# Altium PCB 【tb7152677】dengyuxiang v3.0.PcbDoc (part 2 of 2)
Units mm, origin at the board's own origin, x right, y up, seen from the top; angles counter-clockwise.
Board outline 152.4 x 101.6 mm, 2 copper layers (Top Layer, Bottom Layer); 58 components, 46 nets, 215 pads, 61 vias.
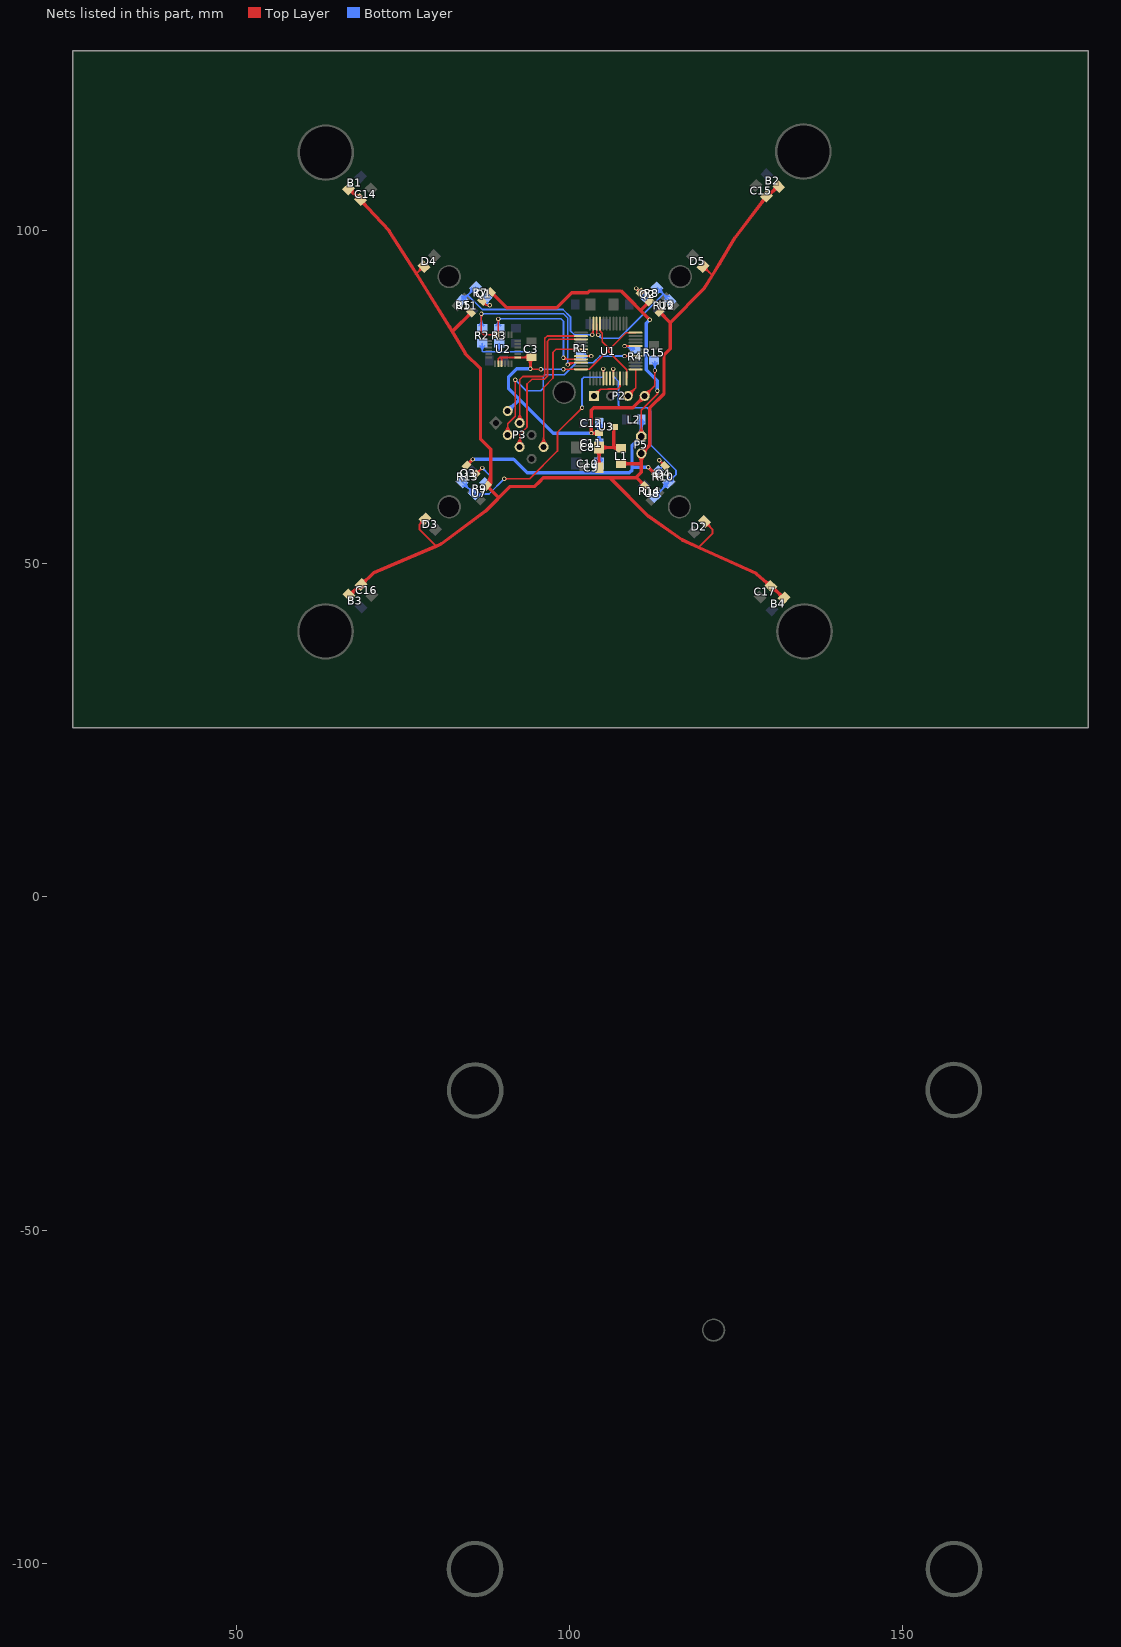
[diagram p2: the nets of this part, all layers, seen from the top]

## Via types
v1: diameter 0.635, hole 0.381, Top Layer to Bottom Layer, 61 vias

## Nets (pads, with @x,y where several pads share a name; then routed paths per layer and width w, separated by ;. In a path a pad name is that pad's centre, name@x,y a point inside that pad or via, vN(x,y) a via of type N, cw(c..) or ccw(c..) an arc to the next point about the centre after c; other vN are vias at no path point) (continued)
NetQ1_1: Q1.1 R7.2 | length 4.7
  Top Layer w0.254: Q1.1@86.864,89.404 87.496,88.773 ; Q1.1@87.016,88.95 cw(c87.065,88.342) 87.496,88.773 ; Q1.1@87.319,89.252 ccw(c87.927,89.204) 87.496,88.773 ; v1@87.876,88.638 ccw(c87.551,88.313) 87.551,88.773 ccw(c87.551,89.233) v1@87.876,88.908 ; v1(88.011,88.773) 87.496,88.773
  Bottom Layer w0.254: R7.2@87.47,89.314 v1(88.011,88.773) ; v1@87.82,88.773 ccw(c87.361,88.773) 87.686,89.098 ccw(c88.011,89.423) v1@88.011,88.963
NetQ2_1: Q2.1 R8.2 | length 7.7
  Top Layer w0.254: v1@109.982,91.123 cw(c109.982,90.663) 110.307,90.988 cw(c110.632,91.313) v1@110.172,91.313 ; v1(109.982,91.313) Q2.1@110.613,90.682 ; Q2.1@110.283,90.682 ccw(c109.486,90.682) 110.05,91.245 ccw(c110.613,91.809) Q2.1@110.613,91.012
  Bottom Layer w0.254: v1@109.982,91.123 cw(c109.982,90.663) 110.307,90.988 cw(c110.632,91.313) v1@110.172,91.313 ; v1(109.982,91.313) R8.2@111.507,89.788 ; 110.546,90.749 cw(c109.667,89.871) R8.2@110.91,89.871 ; 110.562,90.733 ccw(c111.418,91.588) R8.2@111.418,90.379
NetQ3_1: Q3.1 R9.2 | length 7.2
  Top Layer w0.254: Q3.1@85.856,63.369 v1(86.868,64.382) ; Q3.1@85.981,63.825 ccw(c85.981,64.623) 86.545,64.059 ccw(c87.109,63.495) Q3.1@86.311,63.495 ; v1@86.677,64.382 cw(c86.218,64.382) 86.543,64.057 cw(c86.868,63.731) v1@86.868,64.191
  Bottom Layer w0.254: v1@86.868,64.191 cw(c86.868,63.731) 87.193,64.057 cw(c87.518,64.382) v1@87.058,64.382 ; v1(86.868,64.382) 88.011,63.239 88.011,62.748 R9.2@87.333,62.07
NetQ4_1: Q4.1 R10.2 | length 6.3
  Top Layer w0.254: v1@113.418,65.341 cw(c113.418,64.882) 113.743,65.207 cw(c114.069,65.532) v1@113.609,65.532 ; v1(113.418,65.532) Q4.1@114.304,64.647 ; Q4.1@113.848,64.772 ccw(c113.05,64.772) 113.614,65.336 ccw(c114.178,65.9) Q4.1@114.178,65.102
  Bottom Layer w0.254: R10.2@113.19,63.838 114.046,64.694 114.046,64.904 v1(113.418,65.532) ; v1@113.418,65.341 cw(c113.418,64.882) 113.743,65.207 cw(c114.069,65.532) v1@113.609,65.532
NetR1_1: R1.1 U1.20 | length 6.5
  Top Layer w0.254: U1.20@101.691,81.165 v1(103.239,81.165) ; v1@103.104,81.03 ccw(c102.779,80.705) 102.779,81.165 ccw(c102.779,81.625) v1@103.104,81.3
  Bottom Layer w0.254: R1.1@101.689,81.165 v1(103.239,81.165) ; R1.1@102.17,80.801 cw(c103.049,79.922) v1@103.049,81.165 ; R1.1@102.17,81.519 ccw(c103.026,82.375) v1@103.026,81.165 ; v1@103.104,81.03 ccw(c102.779,80.705) 102.779,81.165 ccw(c102.779,81.625) v1@103.104,81.3
NetR4_2: R4.2 U1.44 | length 7.7
  Top Layer w0.254: v1(108.216,82.665) U1.44@109.891,82.665 ; v1@108.351,82.53 cw(c108.676,82.205) 108.676,82.665 cw(c108.676,83.125) v1@108.351,82.8
  Bottom Layer w0.254: v1@108.351,82.53 cw(c108.676,82.205) 108.676,82.665 cw(c108.676,83.125) v1@108.351,82.8 ; 108.595,82.665 cw(c108.595,81.702) R4.2@109.486,82.068 ; 108.974,82.665 cw(c108.974,81.857) R4.2@109.721,82.164 ; R4.2@109.251,81.971 ccw(c108.216,81.546) v1(108.216,82.665) R4.2@109.347,82.665
PGND: L2.1 P5.1 Q1.2 Q2.2 Q3.2 Q4.2 | length 100.3
  Top Layer w0.254: P5.1@110.295,69.537 ccw(c109.211,70.621) 110.744,70.621 ccw(c112.277,70.621) P5.1@111.193,69.537 ; P5.1@110.475,69.357 ccw(c109.824,70.008) 110.744,70.008 ccw(c111.664,70.008) P5.1@111.013,69.357 ; P5.1@110.744,69.088 110.744,73.025 113.157,75.438 v1(113.157,75.946) ; v1@113.022,75.811 cw(c112.697,75.486) 113.157,75.486 cw(c113.617,75.486) v1@113.292,75.811
  Top Layer w0.508: Q3.2@84.508,64.717 v1(85.451,65.659) ; Q3.2@84.634,65.045 ccw(c84.634,65.536) 84.981,65.189 ccw(c85.328,64.842) Q3.2@84.837,64.842 ; Q1.2@88.212,90.752 90.571,88.392 98.044,88.392 100.311,90.659 102.732,90.659 103.005,90.932 107.696,90.932 v1(112.014,86.614) ; Q1.2@88.337,90.423 cw(c88.337,89.932) 88.684,90.279 cw(c89.031,90.626) Q1.2@88.54,90.626 ; 110.68,88.054 Q2.2@111.961,89.334 ; Q2.2@111.632,89.209 cw(c111.141,89.209) 111.488,88.862 cw(c111.835,88.515) Q2.2@111.835,89.006 ; v1(111.788,64.468) Q4.2@112.956,63.299 ; Q4.2@112.628,63.425 ccw(c112.137,63.425) 112.484,63.772 ccw(c112.831,64.119) Q4.2@112.831,63.628
  Bottom Layer w0.508: v1(85.451,65.659) 91.567,65.659 93.599,63.627 108.966,63.627 109.347,64.008 109.347,67.691 P5.1@110.744,69.088 110.744,71.616 L2.1@110.749,71.621 ; 109.395,64.468 v1(111.788,64.468) ; P5.1@110.236,69.088 cw(c109.01,69.088) 109.877,68.221 cw(c110.744,67.354) P5.1@110.744,68.58 ; P5.1@110.385,69.447 ccw(c109.518,70.314) 110.744,70.314 ccw(c111.97,70.314) P5.1@111.103,69.447 ; L2.1@110.479,71.225 cw(c109.841,70.586) 110.744,70.586 ; 110.744,70.563 cw(c111.68,70.563) L2.1@111.018,71.225 ; v1(112.014,86.614) 111.487,86.087 111.487,79.132 113.157,77.462 v1(113.157,75.946)
PWM1: R7.1 R11.2 U1.11 | length 33
  Top Layer w0.254: v1@103.243,84.463 ccw(c102.525,85.181) U1.11@103.541,85.181 ; v1@103.541,84.491 U1.11@103.541,86.015
  Bottom Layer w0.254: R11.2@83.726,89.492 83.897,89.492 R7.1@85.853,91.448 ; R11.2@83.816,89.836 ccw(c83.816,90.862) 84.542,90.137 ; R11.2@83.816,90.09 ccw(c83.816,91.729) 84.975,90.57 ; R11.2@84.324,89.582 cw(c85.137,89.582) 84.562,90.157 ; 84.709,90.297 86.868,88.138 99,88.138 100.101,87.036 100.101,84.963 100.736,84.328 100.774,84.328 100.806,84.361 103.345,84.361 v1(103.378,84.328) ; R7.1@85.256,91.359 cw(c84.029,91.359) 84.896,90.491 cw(c85.764,89.624) R7.1@85.764,90.851 ; 102.84,84.361 cw(c102.84,83.79) v1@103.243,84.193 ; 102.997,84.361 ccw(c102.997,84.709) v1@103.243,84.463
PWM2: R8.1 R12.2 U1.10 | length 21.5
  Top Layer w0.254: 104.041,84.554 U1.10@104.041,86.015
  Bottom Layer w0.254: v1@104.267,84.138 cw(c104.267,83.678) 104.592,84.003 cw(c104.917,84.328) v1@104.457,84.328 ; v1(104.267,84.328) 104.775,83.82 107.442,83.82 114.046,90.424 ; R8.1@113.124,91.397 114.968,89.553 114.968,89.502 R12.2@115.019,89.502 ; R8.1@113.214,90.799 cw(c113.214,89.573) 114.081,90.44 cw(c114.948,91.307) R8.1@113.722,91.307 ; R12.2@114.421,89.592 ccw(c113.195,89.592) 114.062,90.459 ccw(c114.929,91.326) R12.2@114.929,90.1
PWM3: R9.1 R13.2 U1.29 | length 47.3
  Top Layer w0.254: v1(90.17,62.738) 93.98,62.738 98.171,66.929 98.171,69.723 v1(101.854,73.406) ; v1@90.305,62.603 cw(c90.63,62.278) 90.63,62.738 cw(c90.63,63.198) v1@90.305,62.873 ; v1@101.663,73.406 cw(c101.204,73.406) 101.529,73.081 cw(c101.854,72.756) v1@101.854,73.215 ; v1@104.906,79.101 cw(c104.581,78.776) 105.041,78.776 cw(c105.501,78.776) v1@105.176,79.101 ; U1.29@105.041,77.815 v1(105.041,79.236)
  Bottom Layer w0.254: R13.2@83.868,62.256 85.671,60.453 R9.1@85.717,60.453 87.884,60.453 v1@90.169,62.738 ; R13.2@83.958,61.659 cw(c83.958,60.432) 84.825,61.299 cw(c85.692,62.167) R13.2@84.466,62.167 ; 84.681,61.443 ccw(c85.627,62.389) R9.1@85.627,61.051 ; 84.792,61.332 cw(c84.004,60.543) R9.1@85.119,60.543 ; 85.115,61.009 ccw(c85.627,61.522) R9.1@85.627,60.797 ; R9.1@85.986,60.184 cw(c86.637,59.534) 86.637,60.453 ; R9.1@86.166,60.004 cw(c87.25,58.92) 87.25,60.453 ; R9.1@86.166,60.723 ccw(c86.816,61.373) 86.816,60.453 ; 89.842,62.412 cw(c90.17,62.084) v1@90.17,62.547 ; 89.846,62.415 ccw(c89.523,62.738) v1@89.98,62.738 ; v1@101.719,73.541 ccw(c101.394,73.866) 101.854,73.866 ccw(c102.314,73.866) v1@101.989,73.541 ; v1(101.854,73.406) 101.854,77.724 102.108,77.978 104.902,77.978 105.041,78.117 v1(105.041,79.236) ; v1@104.906,79.101 cw(c104.581,78.776) 105.041,78.776 cw(c105.501,78.776) v1@105.176,79.101
PWM4: R10.1 R14.2 U1.32 | length 36.1
  Top Layer w0.254: v1@106.406,79.101 cw(c106.081,78.776) 106.541,78.776 cw(c107.001,78.776) v1@106.676,79.101 ; U1.32@106.541,77.815 v1(106.541,79.236)
  Bottom Layer w0.254: v1@106.406,79.101 cw(c106.081,78.776) 106.541,78.776 cw(c107.001,78.776) v1@106.676,79.101 ; v1(106.541,79.236) 106.541,78.117 107.315,77.343 107.315,73.787 107.696,73.406 111.649,73.406 112.116,72.939 112.116,67.843 115.951,64.008 115.951,63.366 R10.1@114.807,62.222 114.807,62.095 R14.2@112.784,60.072 ; R14.2@112.874,60.67 ccw(c112.874,61.897) 113.741,61.029 ccw(c114.609,60.162) R14.2@113.382,60.162 ; 113.76,61.048 ccw(c112.676,62.132) R10.1@114.209,62.132 ; 114.066,61.355 cw(c114.717,60.704) R10.1@114.717,61.624 ; 114.193,61.482 ccw(c113.543,62.132) R10.1@114.463,62.132 ; R10.1@114.896,62.82 ccw(c114.896,64.046) 115.764,63.179 ccw(c116.631,62.312) R10.1@115.404,62.312
RX1: U1.31
SCL: R3.1 U1.21 U2.23 | length 28.1
  Top Layer w0.254: v1@89.146,86.606 cw(c88.816,86.276) 89.283,86.276 ; U2.23@89.283,84.375 v1@89.283,86.739 ; 89.283,86.286 cw(c89.736,86.286) v1@89.416,86.606 ; v1@99.015,80.854 ccw(c99.472,81.311) 99.472,80.665 ; v1(99.06,80.899) 99.294,80.665 U1.21@101.691,80.665 ; v1@99.195,81.034 ccw(c100.085,81.924) 100.085,80.665
  Bottom Layer w0.254: R3.1@88.929,85.698 ccw(c88.078,86.549) v1@89.281,86.549 ; v1@89.146,86.606 cw(c88.821,86.281) 89.281,86.281 cw(c89.741,86.281) 89.416,86.606 cw(c89.741,86.281) 89.741,86.741 cw(c89.741,87.201) v1@89.416,86.876 ; R3.1@89.281,85.473 v1(89.281,86.741) 98.679,86.741 99.06,86.36 v1(99.06,80.899) ; v1@89.281,86.582 ccw(c90.531,86.582) R3.1@89.647,85.698 ; v1@98.925,81.034 ccw(c98.6,81.359) 99.06,81.359 ccw(c99.52,81.359) v1@99.195,81.034
SDA: R2.1 U1.22 U2.24 | length 35.9
  Top Layer w0.254: v1@86.606,87.368 cw(c86.281,87.043) 86.741,87.043 cw(c87.201,87.043) v1@86.876,87.368 ; v1(86.741,87.503) 86.741,84.709 87.075,84.375 U2.24@88.783,84.375 ; v1@99.65,79.928 cw(c100.222,79.356) 100.222,80.165 ; v1(99.695,79.883) 99.977,80.165 U1.22@101.691,80.165 ; v1@99.83,79.748 cw(c100.836,78.742) U1.22@100.836,80.165
  Bottom Layer w0.254: R2.1@86.389,85.698 ccw(c85.538,86.549) 86.741,86.549 ; v1@86.606,87.368 cw(c86.281,87.043) 86.741,87.043 cw(c87.201,87.043) 86.876,87.368 cw(c87.201,87.043) 87.201,87.503 cw(c87.201,87.963) v1@86.876,87.638 ; R2.1@86.741,85.473 v1(86.741,87.503) 99.06,87.503 99.695,86.868 v1(99.695,79.883) ; 86.741,86.582 ccw(c87.991,86.582) R2.1@87.107,85.698 ; v1@99.56,80.018 ccw(c99.235,80.343) 99.695,80.343 ccw(c100.155,80.343) v1@99.83,80.018
SWCLK: P2.3 U1.37 | length 8.2
  Top Layer w0.254: P2.3@108.712,75.184 109.891,76.363 U1.37@109.891,79.165 ; P2.3@108.712,75.553 ccw(c108.712,76.444) 109.342,75.814 ccw(c109.972,75.184) P2.3@109.081,75.184 ; P2.3@108.712,75.807 ccw(c108.712,77.311) 109.776,76.248 ccw(c110.839,75.184) P2.3@109.335,75.184
SWDIO: P2.1 U1.34 | length 9.2
  Top Layer w0.254: P2.1@103.632,75.184 104.648,76.2 ; P2.1@103.644,75.553 ccw(c103.67,76.349) 104.234,75.786 ccw(c104.797,75.222) P2.1@104.001,75.196 ; P2.1@103.652,75.807 ccw(c103.697,77.151) 104.648,76.2 ; P2.1@104.255,75.204 cw(c105.599,75.249) 104.648,76.2 ; U1.34@107.541,77.815 107.541,76.553 107.201,76.213 105.746,76.213 105.732,76.2 104.648,76.2
TX1: U1.30
VCC: C8.1 C9.1 L1.2 U3.3 | length 16.6
  Top Layer w0.508: C8.1@104.04,66.958 cw(c103.172,66.09) 104.399,66.09 cw(c105.625,66.09) C8.1@104.758,66.958 ; C9.1@104.129,64.792 ccw(c103.479,65.443) 104.399,65.443 ccw(c105.319,65.443) C9.1@104.668,64.792 ; C9.1@104.399,64.396 C8.1@104.399,67.444 107.564,67.444 L1.2@107.703,67.305 ; C8.1@104.758,67.085 cw(c105.625,66.217) 105.625,67.444 cw(c105.625,68.67) C8.1@104.758,67.803 ; 106.321,67.444 cw(c106.321,66.05) L1.2@107.306,67.036 ; U3.3@106.435,70.397 cw(c106.088,70.05) 106.578,70.05 cw(c107.069,70.05) U3.3@106.722,70.397 ; 106.578,67.469 U3.3@106.578,70.541
VCC1: C3.1 C10.1 C11.1 C12.1 P2.4 P3.2 R2.2 R3.2 R15.2 U1.9 U1.24 U1.36 U1.48 U2.8 U2.9 U2.13 U3.2 | length 128
  Top Layer w0.254: U2.8@89.283,80.025 89.283,80.774 89.459,80.95 U2.13@92.208,80.95 C3.1@94.17,80.95 ; U2.9@89.783,80.025 89.783,80.944 ; 92.716,80.95 ccw(c92.716,82.419) C3.1@93.755,81.38 ; 93.059,80.95 cw(c93.059,79.966) C3.1@93.755,80.662 ; 93.329,80.95 ccw(c93.329,81.806) C3.1@93.934,81.201 ; v1(94.107,79.248) 94.19,79.165 v1(95.675,79.165) ; v1@94.242,79.383 ccw(c94.767,79.908) 94.767,79.165 ; v1@95.54,79.03 ccw(c95.215,78.705) 95.215,79.165 ccw(c95.215,79.625) v1@95.54,79.3 ; v1(99.06,79.165) U1.24@101.691,79.165 102.937,79.165 105.721,81.949 ; v1@99.195,79.03 cw(c99.52,78.705) 99.52,79.165 cw(c99.52,79.625) v1@99.195,79.3 ; U1.9@104.541,86.015 104.541,84.943 104.902,84.582 104.902,83.323 105.998,82.226 ; U1.9@104.564,85.115 ccw(c105.035,85.115) 104.702,84.782 ; U1.36@108.541,77.815 108.541,79.129 105.721,81.949 ; U1.48@109.891,84.665 108.437,84.665 105.998,82.226 ; P2.4@111.252,75.184 112.776,76.708 v1(112.776,78.994) ; P2.4@111.252,75.553 ccw(c111.252,76.444) 111.882,75.814 ccw(c112.512,75.184) P2.4@111.621,75.184 ; P2.4@111.252,75.807 ccw(c111.252,77.311) 112.316,76.248 ccw(c113.379,75.184) P2.4@111.875,75.184 ; v1@112.641,78.859 cw(c112.316,78.534) 112.776,78.534 cw(c113.236,78.534) v1@112.911,78.859 ; 105.721,81.949 105.998,82.226
  Top Layer w0.508: C3.1@93.844,80.752 cw(c93.211,80.118) 94.107,80.118 ; v1(94.107,79.248) C3.1@94.107,80.887 ; 94.107,80.085 cw(c95.05,80.085) C3.1@94.383,80.752 ; 103.713,69.596 ccw(c103.713,70.104) U3.2@104.073,69.745 ; 103.738,69.596 cw(c103.738,69.123) U3.2@104.073,69.457 ; U3.2@104.394,69.601 104.389,69.596 v1(103.251,69.596) 103.251,73.025 103.632,73.406 109.474,73.406 P2.4@111.252,75.184 ; P2.4@110.756,75.184 cw(c109.559,75.184) 110.405,74.337 cw(c111.252,73.491) P2.4@111.252,74.688
  Bottom Layer w0.254: R2.2@86.534,82.676 cw(c85.839,81.908) 86.875,81.908 ; R2.2@86.875,83.053 86.875,81.908 ; R2.2@87.216,82.676 ccw(c87.911,81.908) 86.875,81.908 ; R3.2@89.056,82.694 cw(c88.188,81.827) 89.415,81.827 cw(c90.641,81.827) R3.2@89.774,82.694 ; 89.415,81.795 R3.2@89.415,83.053 ; v1@93.972,79.383 ccw(c93.647,79.708) 94.107,79.708 ccw(c94.567,79.708) v1@94.242,79.383 ; v1(94.107,79.248) 94.107,81.534 93.853,81.788 86.995,81.788 86.875,81.908 ; v1(95.675,79.165) v1(99.06,79.165) ; v1@95.81,79.03 cw(c96.135,78.705) 96.135,79.165 cw(c96.135,79.625) v1@95.81,79.3 ; v1@98.925,79.03 ccw(c98.6,78.705) 98.6,79.165 ccw(c98.6,79.625) v1@98.925,79.3 ; R15.2@112.424,80.164 cw(c111.573,79.313) 112.776,79.313 ; v1@112.641,79.129 ccw(c112.316,79.454) 112.776,79.454 ccw(c113.236,79.454) v1@112.911,79.129 ; v1(112.776,78.994) R15.2@112.776,80.403 ; v1@112.776,79.28 cw(c114.026,79.28) R15.2@113.142,80.164
  Bottom Layer w0.508: P3.2@90.696,72.916 92.392,74.612 ; P3.2@90.696,73.412 ccw(c90.696,74.609) 91.543,73.763 ccw(c92.389,72.916) P3.2@91.192,72.916 ; v1(94.107,79.248) 92.075,79.248 90.805,77.978 90.805,76.327 97.536,69.596 v1(103.251,69.596) 104.399,69.596 ; C10.1@104.04,65.503 ccw(c103.172,66.371) 104.399,66.371 ccw(c105.625,66.371) C10.1@104.758,65.503 ; C11.1@104.129,67.669 cw(c103.479,67.018) 104.399,67.018 cw(c105.319,67.018) C11.1@104.668,67.669 ; C11.1@104.129,68.462 ccw(c103.479,69.112) 104.399,69.112 ccw(c105.319,69.112) C11.1@104.668,68.462 ; C12.1@104.129,70.717 cw(c103.479,70.066) 104.399,70.066 cw(c105.319,70.066) C12.1@104.668,70.717 ; C10.1@104.399,65.017 C11.1@104.399,68.065 104.399,69.596 ; C12.1@104.399,71.113 104.399,69.596
VCC_BAT: B1.1 B2.1 B3.1 B4.1 C14.1 C15.1 C16.1 C17.1 D2.1 D3.1 D4.1 D5.1 L1.1 P5.2 U5.3 U6.3 U7.3 U8.3 | length 246.5
  Top Layer w0.254: 76.971,93.521 D4.1@78.1,94.614 ; D4.1@77.592,94.622 cw(c76.365,94.641) 77.219,93.76 cw(c78.072,92.879) D4.1@78.091,94.106 ; D3.1@77.682,56.572 cw(c76.938,56.463) 77.47,55.931 ; D3.1@78.111,56.143 ccw(c78.002,55.399) 77.47,55.931 ; D3.1@78.275,56.736 77.47,55.931 ; 79.907,52.681 77.47,55.118 77.47,55.931 ; 119.379,52.44 119.379,52.45 121.412,54.483 121.412,55.169 D2.1@120.236,56.345 ; D5.1@120.016,94.61 121.383,93.263 ; D5.1@120.02,94.102 cw(c120.029,92.875) 120.89,93.749 cw(c121.751,94.623) D5.1@120.524,94.613 ; D2.1@120.326,55.747 cw(c120.326,54.521) 121.193,55.388 cw(c122.06,56.255) D2.1@120.834,56.255
  Top Layer w0.508: B1.1@66.83,106.253 C14.1@68.581,104.64 72.898,99.949 76.253,94.668 76.971,93.521 81.975,85.531 82.344,84.905 84.328,81.534 86.614,79.248 86.614,68.707 88.138,67.183 88.138,62.269 U7.3@87.568,61.699 89.281,59.985 ; B3.1@66.883,45.311 C16.1@68.699,46.862 70.612,48.641 79.927,52.633 80.747,52.984 87.376,57.912 91.059,61.595 94.75,61.595 95.466,62.311 95.466,62.319 96.037,62.89 106.045,62.89 ; B1.1@67.301,106.358 ccw(c68.653,106.414) 67.736,105.419 ; B3.1@67.352,45.191 cw(c68.7,45.085) 67.822,46.113 ; 67.802,105.357 ccw(c68.438,106.047) C14.1@68.476,105.11 ; 67.821,105.34 cw(c67.21,104.677) C14.1@68.111,104.714 ; 67.885,46.166 cw(c68.504,45.441) C16.1@68.579,46.392 ; 67.921,46.198 ccw(c67.346,46.871) C16.1@68.229,46.802 ; C14.1@68.655,104.169 cw(c68.618,103.268) 69.282,103.879 ; C16.1@68.802,47.332 ccw(c68.836,48.267) 69.473,47.582 ; C14.1@69.052,104.534 ccw(c69.989,104.495) 69.299,103.86 ; C16.1@69.169,46.938 cw(c70.073,46.905) 69.457,47.567 ; 82.496,84.995 U5.3@85.194,87.692 ; U5.3@84.99,87.692 cw(c84.5,87.692) 84.847,87.346 cw(c85.194,86.999) U5.3@85.194,87.489 ; U7.3@87.55,61.968 ccw(c86.129,63.389) 88.138,63.389 ; U7.3@87.568,61.495 cw(c87.568,61.005) 87.914,61.352 cw(c88.261,61.699) U7.3@87.771,61.699 ; U7.3@87.693,62.028 ccw(c87.693,62.518) 88.04,62.171 ccw(c88.387,61.824) U7.3@87.896,61.824 ; U7.3@87.909,61.609 ccw(c87.356,62.162) 88.138,62.162 ; L1.1@107.703,65.019 110.739,65.019 ; L1.1@108.099,64.75 cw(c108.75,64.099) 108.75,65.019 cw(c108.75,65.939) L1.1@108.099,65.289 ; 110.045,62.89 U8.3@111.275,61.66 ; P5.2@110.385,66.189 cw(c109.518,65.322) 110.744,65.322 cw(c111.97,65.322) P5.2@111.103,66.189 ; P5.2@110.744,67.056 ccw(c110.744,68.282) 111.611,67.415 ccw(c112.478,66.548) P5.2@111.252,66.548 ; U8.3@110.946,61.785 ccw(c110.456,61.785) 110.803,62.132 ccw(c111.15,62.479) U8.3@111.15,61.988 ; U6.3@113.473,87.577 cw(c113.473,87.087) 113.82,87.433 cw(c114.167,87.78) U6.3@113.677,87.78 ; U6.3@113.473,87.78 115.062,86.192 ; 128.89,104.292 ccw(c128.112,104.884) C15.1@129.081,105.016 ; 128.941,104.358 cw(c129.626,103.837) C15.1@129.51,104.69 ; 129.373,47.321 ccw(c129.998,48.033) C17.1@130.059,47.087 ; 129.402,47.295 cw(c128.813,46.625) C17.1@129.704,46.683 ; C15.1@129.684,105.625 ccw(c129.801,106.59) 130.4,105.825 ; C15.1@130.016,105.201 cw(c130.878,105.097) 130.342,105.78 ; C17.1@130.29,46.147 cw(c130.357,45.199) 130.98,45.917 ; 130.389,105.816 ccw(c129.556,106.879) B2.1@130.896,106.717 ; C17.1@130.643,46.554 ccw(c131.53,46.617) 130.948,45.946 ; 131.246,45.686 cw(c130.36,44.665) B4.1@131.709,44.761 ; B2.1@131.364,106.581 C15.1@129.548,105.157 124.827,98.947 122.485,95.03 121.383,93.263 120.142,91.272 115.062,86.192 ; B4.1@132.179,44.877 C17.1@130.174,46.617 128.016,48.514 119.379,52.44 116.84,53.594 111.785,57.15 106.045,62.89 ; 106.045,62.89 109.88,62.89 110.744,63.754 P5.2@110.744,66.548 112.014,67.818 112.014,72.525 111.989,72.55 111.989,73.381 114.154,75.546 114.154,81.337 115.062,82.245 115.062,85.09 115.062,86.192
W_CE: P3.3 U1.41 | length 37.3
  Top Layer w0.254: P3.3@90.256,69.764 ccw(c89.192,70.828) 90.696,70.828 ccw(c92.2,70.828) P3.3@91.137,69.764 ; P3.3@90.435,69.585 ccw(c89.805,70.215) 90.696,70.215 ccw(c91.587,70.215) P3.3@90.957,69.585 ; P3.3@90.696,69.324 90.696,71.011 91.821,72.136 v1(91.821,77.597) ; v1@91.686,77.462 cw(c91.361,77.137) 91.821,77.137 cw(c92.281,77.137) v1@91.956,77.462 ; v1(108.216,81.165) U1.41@109.891,81.165 ; v1@108.351,81.03 cw(c108.676,80.705) 108.676,81.165 cw(c108.676,81.625) v1@108.351,81.3
  Bottom Layer w0.254: v1@91.821,77.406 cw(c91.821,76.947) 92.146,77.272 cw(c92.471,77.597) v1@92.011,77.597 ; v1(91.821,77.597) 93.472,75.946 95.631,75.946 96.012,76.327 96.012,78.105 96.266,78.359 99.187,78.359 100.965,80.137 103.505,80.137 104.533,81.165 v1(108.216,81.165) ; v1@108.081,81.03 ccw(c107.756,80.705) 107.756,81.165 ccw(c107.756,81.625) v1@108.081,81.3
W_CSN: P3.4 U1.14 | length 25.4
  Top Layer w0.254: P3.4@92.052,71.561 ccw(c90.988,72.624) 92.492,72.624 ccw(c93.996,72.624) P3.4@92.933,71.561 ; P3.4@92.231,71.381 ccw(c91.601,72.011) 92.492,72.011 ccw(c93.383,72.011) P3.4@92.753,71.381 ; P3.4@92.492,71.12 92.492,77.633 92.964,78.105 96.012,78.105 96.272,78.365 96.272,79.412 96.266,79.418 96.266,83.82 96.611,84.165 U1.14@101.691,84.165
W_IRQ: P3.8 U1.18 | length 22.9
  Top Layer w0.254: P3.8@95.644,67.968 ccw(c94.58,69.032) 96.084,69.032 ccw(c97.588,69.032) P3.8@96.525,67.968 ; P3.8@95.823,67.789 ccw(c95.193,68.419) 96.084,68.419 ccw(c96.975,68.419) P3.8@96.345,67.789 ; P3.8@96.084,67.528 96.084,76.453 97.491,77.86 97.491,79.917 97.485,79.923 97.485,81.737 97.676,81.928 97.698,81.928 97.935,82.165 U1.18@101.691,82.165
W_SCK: P3.5 U1.15 | length 27.6
  Top Layer w0.254: P3.5@92.052,67.968 ccw(c90.988,69.032) 92.492,69.032 ccw(c93.996,69.032) P3.5@92.933,67.968 ; P3.5@92.231,67.789 ccw(c91.601,68.419) 92.492,68.419 ccw(c93.383,68.419) P3.5@92.753,67.789 ; P3.5@92.492,67.528 92.492,69.378 93.599,70.485 93.599,76.962 94.336,77.699 96.18,77.699 96.678,78.197 96.678,79.581 96.672,79.586 96.672,83.403 96.934,83.665 U1.15@101.691,83.665
pads on no net: U1.1 U1.2 U1.3 U1.4 U1.12 U1.13 U1.25 U1.26 U1.27 U1.28 U1.33 U1.39 U1.40 U1.42 U1.43 U1.45 U1.46 U2.1 U2.2 U2.3 U2.4 U2.5 U2.14 U2.15 U2.16 U2.17 U2.19 U2.21 U2.22 U5.2 U6.1 U7.2 U8.1

## Polygon pours and split planes (outlines as drawn)
GND on Top Layer "GND" (solid, remove dead copper, pour order 2): 55.118,121.031 56.388,119.761 142.621,119.761 142.621,34.29 138.811,30.48 137.16,32.131 56.769,32.131 56.769,120.65 57.277,121.158
GND on Bottom Layer "GND" (solid, remove dead copper, pour order 4): 53.594,120.777 53.975,120.396 147.447,120.396 147.447,24.638 146.939,24.13 140.208,30.861 57.658,30.861 57.658,122.555 57.023,123.19

## Keep-outs
Keep-Out Layer:
  lines w0.254: 83.421,79.565 ccw(c63.789,75.749) 81.915,84.201 73.318,98.177 ccw(c54.337,83.403) 63.388,105.688 cw(c63.388,111.688) 69.388,111.688 ccw(c91.673,120.739) 76.9,101.758 90.664,93.091 ccw(c99.117,111.217) 95.3,91.585 ; 83.439,79.629 84.201,80.391 85.979,78.613 83.82,76.454 ; 83.777,76.447 cw(c63.789,75.749) 81.915,67.296 73.295,53.364 cw(c54.314,68.138) 63.365,45.853 ccw(c63.365,39.853) 69.365,39.853 cw(c91.65,30.802) 76.877,49.783 90.664,58.547 cw(c99.117,40.421) 100.163,60.393 ; 93.794,-100.863 cw(c85.794,-100.863) 85.794,-92.863 ccw(c76.742,-70.578) 100.794,-70.863 100.794,-59.028 ; 93.878,-100.863 cw(c116.163,-109.915) 115.878,-85.863 127.657,-85.863 cw(c127.372,-109.915) 149.657,-100.863 ; 95.25,91.567 94.488,90.805 96.266,89.027 98.425,91.186 ; 98.419,91.229 ccw(c99.117,111.217) 107.569,93.091 121.535,101.923 ccw(c106.761,120.904) 129.046,111.853 cw(c135.046,111.853) 135.046,105.853 ; 100.203,60.452 102.108,62.357 103.378,61.087 102.489,60.198 ; 100.817,-59.028 ccw(c76.765,-59.313) 85.817,-37.028 cw(c85.817,-29.028) 93.817,-29.028 ccw(c116.102,-19.977) 115.817,-44.028 127.63,-44.028 ; 102.589,60.117 cw(c99.116,40.421) 107.569,58.547 121.718,49.783 cw(c106.945,30.801) 129.23,39.853 ccw(c135.23,39.853) 135.23,45.853 cw(c144.281,68.138) 125.3,53.364 116.586,67.169 cw(c134.712,75.622) 114.958,72.493 ; 114.681,74.93 112.522,72.771 113.792,71.501 114.935,72.644 ; 114.724,74.924 cw(c134.712,75.622) 116.586,84.074 125.095,98.298 cw(c144.076,83.524) 135.025,105.809 ; 127.63,-43.965 127.63,-44.028 ; 149.63,-29.028 cw(c127.345,-19.977) 127.63,-44.028 ; 149.63,-28.965 cw(c157.63,-28.965) 157.63,-36.965 ; 149.658,-100.863 ccw(c157.658,-100.863) 157.658,-92.863 ; 157.658,-92.964 cw(c166.709,-70.679) 142.658,-70.964 142.658,-58.957 cw(c166.709,-59.242) 157.658,-36.957

## Other copper
Top Layer:
  text "Dengyuxiang" at 85.217,67.564 h0.76 r90

## Silkscreen, mask and mechanical layers (free items; w line width, h text height)
Top Overlay:
  circle w0.254: c99.136,75.794 r3
  circle w0.254: c121.564,-64.922 r3
  lines w0.254: 63.388,111.942 63.389,111.434 ; 64.911,112.199 63.388,111.688 ; 64.914,111.183 63.388,111.688 ; 85.793,-100.863 85.793,-100.802 ; 91.32,111.752 63.388,111.688 ; 107.114,111.789 135.046,111.853 ; 133.521,112.358 135.046,111.853 ; 133.524,111.342 135.046,111.853 ; 134.542,110.328 135.046,111.853 ; 134.718,41.375 135.23,39.853 ; 134.792,111.852 135.3,111.854 ; 134.976,39.852 135.484,39.853 ; 135.046,112.107 135.047,111.599 ; 135.118,83.75 135.046,111.853 ; 135.158,67.956 135.23,39.853 ; 135.558,110.33 135.046,111.853 ; 135.734,41.378 135.23,39.853
  text "71.658 (mm)" at 91.577,110.839 h1.52 r0.13
  text "72.001 (mm)" at 134.204,83.493 h1.52 r270.15
  text "VCC" at 110.363,76.708 h0.76
  text "VCC" at 91.059,75.057 h0.76 r315

## Text inside footprints (layer, text, board x,y; h text height)
P3: Top Overlay "2" at 88.541,74.353 h0.76 r315; Top Overlay "1" at 87.104,72.198 h0.76 r315; Top Overlay "7" at 95.007,64.295 h0.76 r315; Top Overlay "8" at 96.803,66.091 h0.76 r315